# Altium PCB SBH.PcbDoc
Units mil, origin at the board's own origin, x right, y up, seen from the top; angles counter-clockwise.
Board outline 1968.5 x 1181.1 mil, 4 copper layers (Top Layer, Mid Layer 1, Mid Layer 2, Bottom Layer), stack 61.811 mil thick; 52 components, 69 nets, 223 pads, 52 vias.
Unrouted connection lines stored in the file: 30.
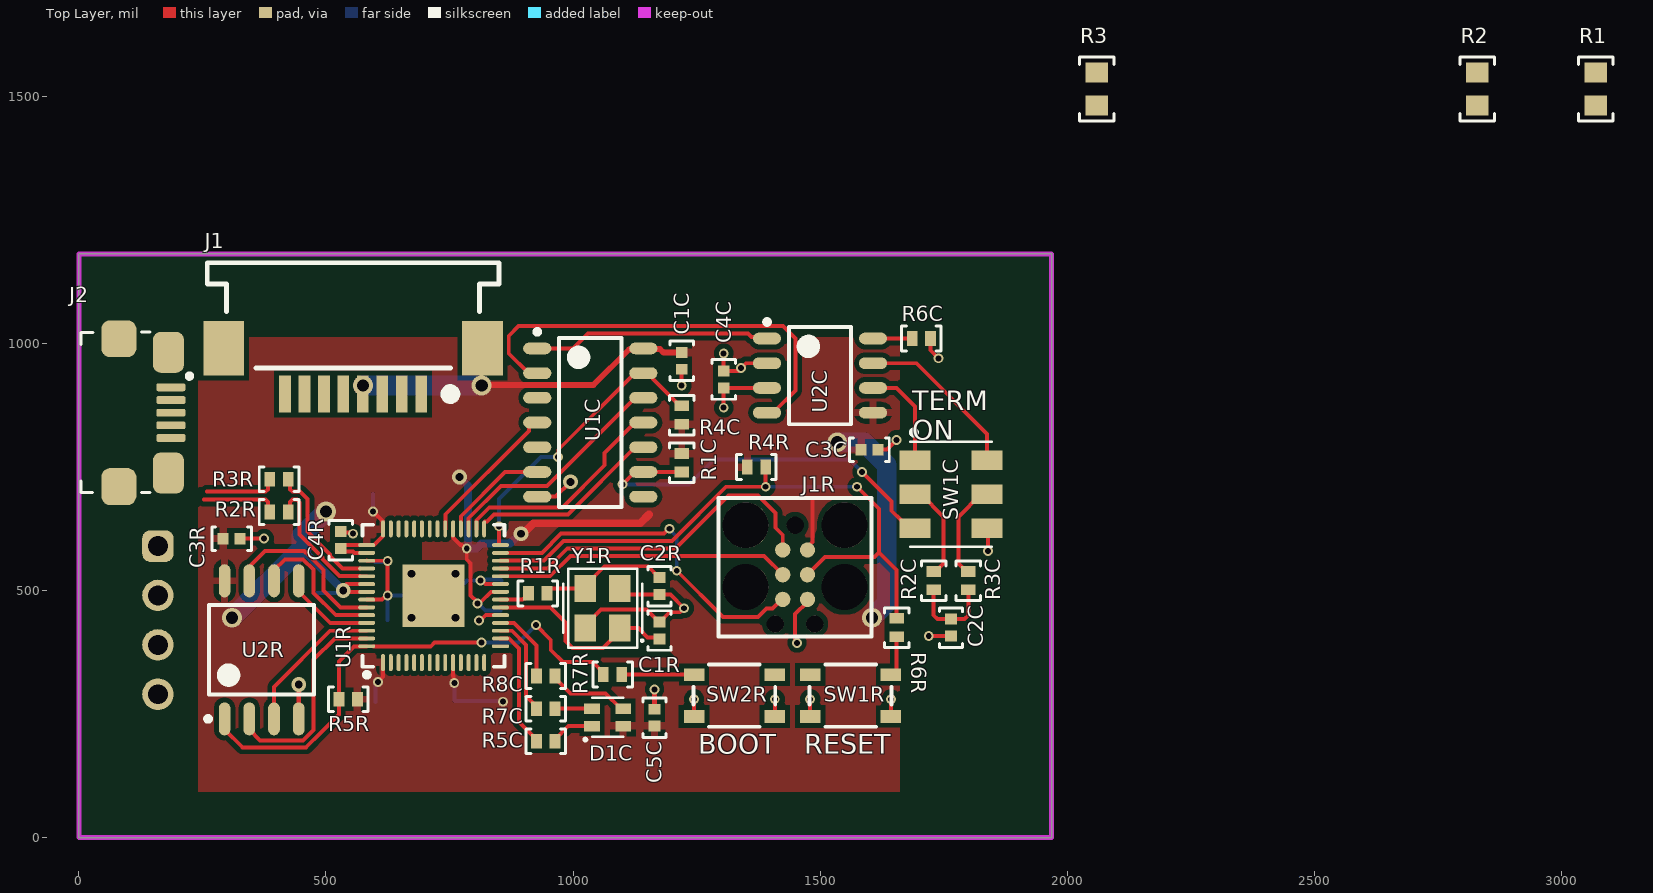
[diagram p0: Top Layer view]
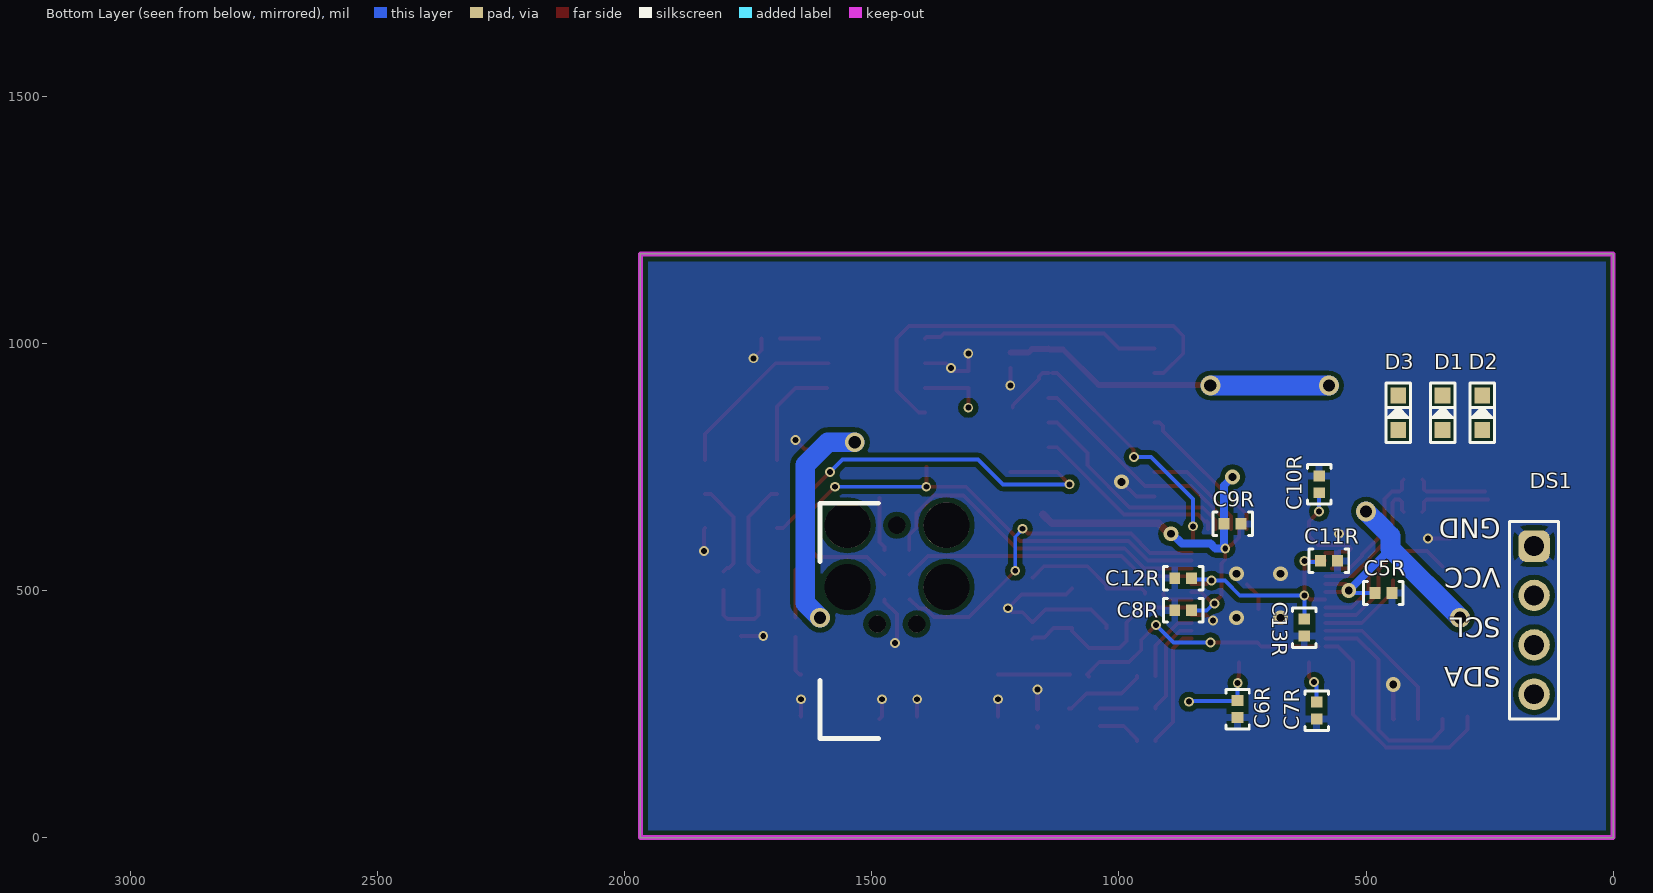
[diagram p1: Bottom Layer view, seen from below]
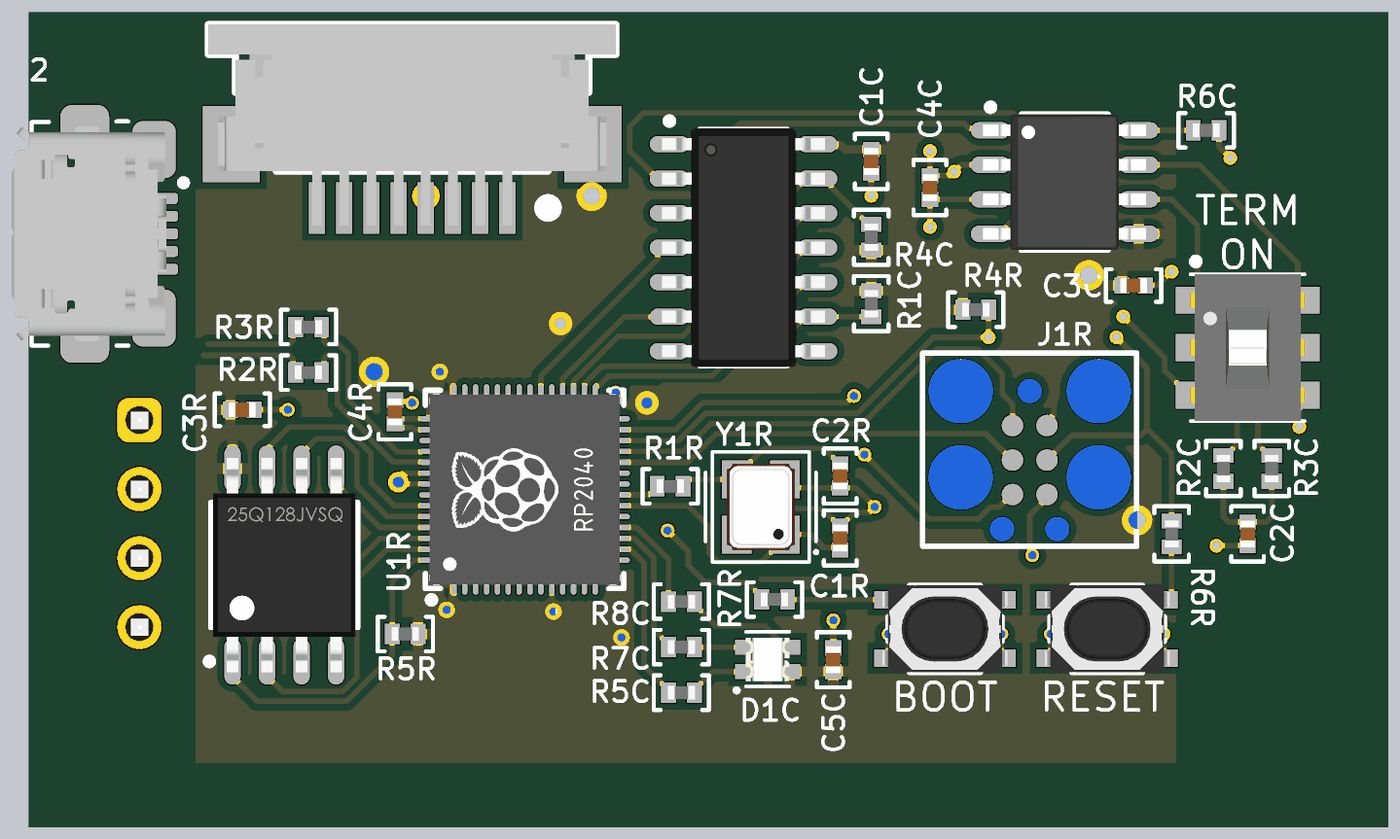
[diagram p2: 3D render of the assembled board from above, using the file's embedded part models]
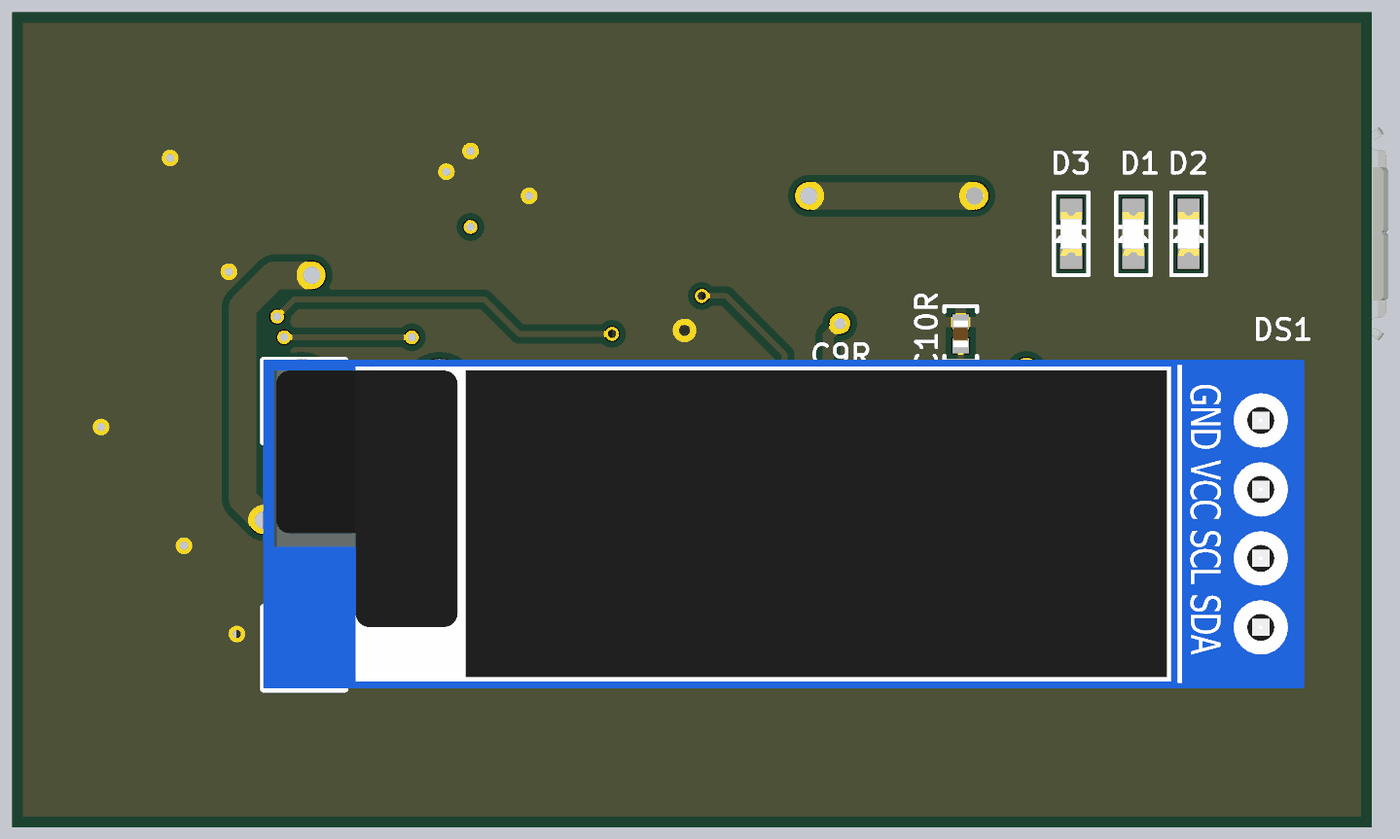
[diagram p3: 3D render of the assembled board from below, using the file's embedded part models]

## Layer stack, top to bottom
Top Solder: solder mask 0.5, Solder Resist, Dk 3.8
Top Layer: signal copper 1.378
Dielectric 1: prepreg 7.874, 7628, Dk 4.6
Mid Layer 1: signal copper 0.689
Core: core 41.9291, FR-4, Dk 4.5
Mid Layer 2: signal copper 0.689
Dielectric 2: prepreg 7.874, 7628, Dk 4.6
Bottom Layer: signal copper 1.378
Bottom Solder: solder mask 0.5, Solder Resist, Dk 3.8

## Board outline
0,0 1968.5,0 1968.5,1181.1 0,1181.1

## Design rules (kind name [scope] priority, off if disabled: settings)
Clearance [All] p1: gap=10 ignorepadtopadclearanceinfootprint=FALSE except(0: Arc-Hole Track-Hole SMDPad-Hole THPad-Hole Via-Hole Fill-Hole Poly-Hole Region-Hole Text-Hole; 6: Arc-Arc Arc-Track Arc-SMDPad Arc-Via Track-Track Track-SMDPad Track-Via SMDPad-SMDPad SMDPad-Via)
DiffPairsRouting [All] p1: maxlimit=10 minlimit=6 mostfreqgap=8 toplayer_minwidth=8 toplayer_maxwidth=15 toplayer_prefwidth=8 midlayer1_minwidth=8 midlayer1_maxwidth=15 midlayer1_prefwidth=8 midlayer2_minwidth=8 midlayer2_maxwidth=15 midlayer2_prefwidth=8 bottomlayer_minwidth=8 bottomlayer_maxwidth=15 bottomlayer_prefwidth=8 maxuncoupledlength=500
HoleSize [All] p1: absolutevalues=TRUE maxlimit=200 minlimit=12 maxpercent=80.000 minpercent=20.000
MinimumSolderMaskSliver [All] p1: minsoldermaskwidth=3
PlaneConnect [All] p1: pad.planeconnectstyle=Relief pad.reliefexpansion=20 pad.reliefentries=4 pad.reliefconductorwidth=10 pad.reliefairgap=10 via.planeconnectstyle=Direct via.reliefexpansion=20 via.reliefentries=4 via.reliefconductorwidth=10 via.reliefairgap=10
PolygonConnect [All] p1: thpad.connectstyle=Relief thpad.reliefconductorwidth=15 thpad.reliefentries=4 thpad.polygonreliefangle="45 Angle" thpad.airgapwidth=10 smdpad.connectstyle=Relief smdpad.reliefconductorwidth=15 smdpad.reliefentries=4 smdpad.polygonreliefangle="90 Angle" smdpad.airgapwidth=10 via.connectstyle=Direct via.reliefconductorwidth=10 via.reliefentries=4 via.polygonreliefangle="90 Angle" via.airgapwidth=10
RoomDefinition U_RP2040_with_CAN [InComponentClass('U_RP2040_with_CAN')] p1: confinementstyle=ConfineIn formatcopy=TRUE lockcomponents=FALSE outline -1000,-1000 1000,-1000 1000,0 -1000,0
RoomDefinition U_RP2040_C [InComponentClass('U_RP2040_C')] p2: confinementstyle=ConfineIn formatcopy=TRUE lockcomponents=FALSE outline -1000,-1000 1000,-1000 1000,0 -1000,0
RoomDefinition SBH_Microcontroller [InComponentClass('SBH_Microcontroller')] p3: confinementstyle=ConfineIn formatcopy=TRUE lockcomponents=FALSE outline 2015,55 2340,55 2340,745 2015,745
RoutingVias [All] p1: holewidth=28 width=50 viastyle="Through Hole" minholewidth=28 minwidth=50 maxholewidth=28 maxwidth=50
SilkToSilkClearance [All] p1: silktosilkclearance=3
SilkToSolderMaskClearance [IsPad] p1: minsilkscreentomaskgap=6 clearancetoexposedcopper=TRUE
SolderMaskExpansion [All] p1: expansion=2 istentingtop=FALSE
Width [All] p1: maxlimit=50 minlimit=6 preferedwidth=10
24 further rules are at their usual default settings.

## Classes and differential pairs
component class U_RP2040_C: C1R C2R C3R C4R C5R C6R C7R C8R C9R C10R C11R C12R C13R J1R R1R R2R R3R R4R R5R R6R R7R SW1R SW2R U1R U2R Y1R
component class U_RP2040_with_CAN: C1C C2C C3C C4C C5C D1C R1C R2C R3C R4C R5C R6C R7C R8C SW1C U1C U2C
component class SBH_Microcontroller: D1 D2 D3 DS1 J2 R1 R2 R3
differential pair class "USB 2.0": USB USB_RP2040
differential pair USB: +USB_P -USB_N
differential pair USB_RP2040: +USB_RP2040_P -USB_RP2040_N

## Components (designator, comment, footprint, x,y, rotation, side; value= is the part's Value field where it differs from the comment)
C1C "100nF Ceramic 25V" CAPACITOR_0402 1220,965 r270 top value=0.1uF
C1R "27pF Ceramic 50V" CAPACITOR_0402 1175,419.11 r90 top value=27pF
C2C "4700pF Ceramic 25V" CAPACITOR_0402 1765,425 r90 top value=4.7nF
C2R "27pF Ceramic 50V" CAPACITOR_0402 1175,509.11 r270 top value=27pF
C3C "100nF Ceramic 25V" CAPACITOR_0402 1600,785 r0 top value=0.1uF
C3R "100nF Ceramic 6.3V" CAPACITOR_0402 308.99,605 r0 top value=0.1uF
C4C "100nF Ceramic 25V" CAPACITOR_0402 1305,927.13 r90 top value=0.1uF
C4R "1uF Ceramic 16V" CAPACITOR_0402 530,601.98 r90 top value=1uF
C5C "1uF Ceramic 16V" CAPACITOR_0402 1165,242.7 r90 top value=1uF
C5R "100nF Ceramic 6.3V" CAPACITOR_0402 465,495 r180 bottom value=0.1uF
C6R "100nF Ceramic 6.3V" CAPACITOR_0402 760,260 r270 bottom value=0.1uF
C7R "100nF Ceramic 6.3V" CAPACITOR_0402 600,257.13 r270 bottom value=0.1uF
C8R "100nF Ceramic 6.3V" CAPACITOR_0402 870,460 r0 bottom value=0.1uF
C9R "100nF Ceramic 6.3V" CAPACITOR_0402 770,635 r180 bottom value=0.1uF
C10R "100nF Ceramic 6.3V" CAPACITOR_0402 595,715 r90 bottom value=0.1uF
C11R "1uF Ceramic 16V" CAPACITOR_0402 575,560 r180 bottom value=1uF
C12R "100nF Ceramic 6.3V" CAPACITOR_0402 870,525 r0 bottom value=0.1uF
C13R "100nF Ceramic 6.3V" CAPACITOR_0402 625,425 r270 bottom value=0.1uF
D1 "150060RS75000" LED_0603 345,860 r90 bottom
D1C "EAST1616RGBB4" LED_0606_4SMD 1070,243.29 r0 top
D2 "150060YS75000" LED_0603 265,860 r90 bottom
D3 "150060GS75000" LED_0603 435,860 r90 bottom
DS1 "DISP OLED 128x32" OLED_I2C_128x32 160,590 r0 bottom
J1 "FFC 1MM BOTTOM R/A" FFC_0522710869 555,935 r180 top
J1R "TagConnect SWD" TC2030-MCP 1449.5,632.13 r270 top
J2 "USB_MICRO R/A" CONN_MINIUSB 80.84,860 r270 top
R1 "62 Ohm 1% 1/4W" RESISTOR_0603 3070,1515 r90 top
R1C "10k Ohm 1% 1/16W" RESISTOR_0402 1220,758.7 r270 top
R1R "1k Ohm 1% 1/16W" RESISTOR_0402 928.7,494.11 r0 top
R2 "62 Ohm 1% 1/4W" RESISTOR_0603 2830,1515 r90 top
R2C "60.4 Ohm 1% 1/16W" RESISTOR_0402 1730,520 r270 top
R2R "27 Ohm 1% 1/16W" RESISTOR_0402 405,658.99 r0 top
R3 "4.7 Ohm 5% 1/8W" RESISTOR_0603 2060,1515 r90 top
R3C "60.4 Ohm 1% 1/16W" RESISTOR_0402 1800,520 r270 top
R3R "27 Ohm 1% 1/16W" RESISTOR_0402 405,725 r0 top
R4C "10k Ohm 1% 1/16W" RESISTOR_0402 1220,855 r90 top
R4R "10k Ohm 1% 1/16W" RESISTOR_0402 1371.3,750 r0 top
R5C "604 Ohm 1% 1/16W" RESISTOR_0402 945,195 r0 top
R5R "10k Ohm 1% 1/16W" RESISTOR_0402 545,280 r180 top
R6C "10k Ohm 1% 1/16W" RESISTOR_0402 1705,1010 r0 top
R6R "1k Ohm 1% 1/16W" RESISTOR_0402 1655,425 r90 top
R7C "200 Ohm 1% 1/16W" RESISTOR_0402 945,261.01 r0 top
R7R "1k Ohm 1% 1/16W" RESISTOR_0402 1080,330 r180 top
R8C "200 Ohm 1% 1/16W" RESISTOR_0402 945,327.02 r0 top
SW1C "Switch DPDT" CAS-220TA 1765,695 r270 top
SW1R "434123025826" SMD_434123025826 1561.69,287.32 r0 top
SW2R "434123025826" SMD_434123025826 1326.69,287.32 r0 top
U1C "MCP2517FD" SOIC-14 1035,840 r0 top
U1R "RP2040" "QFN-56 RP2040" 717.87,489.5 r90 top locked
U2C "CAN Transceiver" SOIC-8 1500,935 r0 top
U2R "W25Q128JVSIQ" "SOIC-8 W25QxJV" 369.86,380 r90 top
Y1R "CRYSTAL 12.0000MHZ 18PF SMD" "4-SMD, NO LEAD CRYSTAL 3.2x2.5mm" 1095,424.11 r90 top

## Footprints (in the part's own frame and the unit in brackets; to place one, negate y for a bottom-side part, rotate by r counter-clockwise, add the part's x,y. Pads: shape width x height; smd on the part's side, far side on the other; paste and mask are expansions set on the pad)
"4-SMD, NO LEAD CRYSTAL 3.2x2.5mm" [mm]
  rrect0% 1.4x1.1 smd: 1(0,0) 2(2.032,0) 3(2.032,1.778) 4(0,1.778)
  silkscreen extent -1.02,-1.2 3.05,2.92, body extent -0.58,-0.36 2.62,2.14, height 0.82
CAPACITOR_0402 [mm]
  rect 0.56x0.6 smd: 1(-0.435,0) 2(0.435,0)
  silkscreen extent -1.02,-0.6 1.02,0.6, body extent -0.5,-0.28 0.5,0.27, height 0.51
CAS-220TA [mm] "SWITCH SLIDE DPDT 100MA 6V"
  rrect0% 1x1.6 smd: 1(-1.75,-1.85) 2(0,-1.85) 3(1.75,-1.85) 4(-1.75,1.85) 5(0,1.85) 6(1.75,1.85)
  silkscreen extent -3.3,-2.1 2.7,2.1, body extent -2.7,-2.1 2.7,2.1, height 2.51
CONN_MINIUSB [mm] "USB2.0 Micro-B Receptacle SMD R/A"
  rrect50% 0.4x1.5 smd: 1(-1.3,2.675) 2(-0.65,2.675) 3(0,2.675) 4(0.65,2.675) 5(1.3,2.675)
  rrect50% 2.1x1.6 smd: 6(-3.1,2.55) 7(3.1,2.55)
  rrect50% 1.9x1.8 smd: 8(3.8,0) 9(-3.8,0)
  silkscreen extent -4.14,-1.96 4.11,3.75, body extent -3.96,-2.67 3.96,2.99, height 2.72
FFC_0522710869 [mm] "Molex FFC 8 Bottom 1.00MM R/A"
  rect 0.6x1.9 smd: 1(-3.5,0.95) 2(-2.5,0.95) 3(-1.5,0.95) 4(-0.5,0.95) 5(0.5,0.95) 6(1.5,0.95) 7(2.5,0.95) 8(3.5,0.95)
  rect 2.1x2.8 smd: MP1(-6.65,-1.4) MP2(6.65,-1.4)
  silkscreen extent -7.5,-5.8 7.5,1.2, body extent -7.5,-5.8 7.5,1.6, height 3.01
LED_0603 [mil] "LED 0603"
  rect 32x32 smd: 1(-35,0) 2(35,0)
  silkscreen extent -60,-25 60,25, body extent -31,-16 31,16, height 28
LED_0606_4SMD [mm]
  rrect0% 0.8x0.55 smd: 1(-0.8,-0.45) 2(-0.8,0.45) 3(0.8,0.45) 4(0.8,-0.45)
  silkscreen extent -1.22,-1.22 0.8,1.02, body extent -0.8,-0.8 0.8,0.8, height 0.35
OLED_I2C_128x32 [mm]
  rrect50% 1.62x1.62 hole 1.02: 1(0,0)
  round 1.62 hole 1.02: 2(0,2.54) 3(0,5.08) 4(0,7.62)
  silkscreen extent -1.25,-2.2 36.7,9.9, body extent -1.59,-2.23 36.71,9.87, height 5.12
"QFN-56 RP2040" [mm] "QFN, 56-Leads, Body 7.00x7.00mm, Pitch 0.40mm, Thermal Pad 3.10x3.10mm, IPC Medium Density"
  oval 0.875x0.2 smd: 1(-3.437,2.6) 2(-3.437,2.2) 3(-3.437,1.8) 4(-3.437,1.4) 5(-3.437,1) 6(-3.437,0.6) 7(-3.437,0.2) 8(-3.437,-0.2) 9(-3.437,-0.6) 10(-3.437,-1) 11(-3.437,-1.4) 12(-3.437,-1.8) 13(-3.437,-2.2) 14(-3.437,-2.6) 29(3.437,-2.6) 30(3.437,-2.2) 31(3.437,-1.8) 32(3.437,-1.4) 33(3.437,-1) 34(3.437,-0.6) 35(3.437,-0.2) 36(3.437,0.2) 37(3.437,0.6) 38(3.437,1) 39(3.437,1.4) 40(3.437,1.8) 41(3.437,2.2) 42(3.437,2.6)
  oval 0.2x0.875 smd: 15(-2.6,-3.437) 16(-2.2,-3.437) 17(-1.8,-3.437) 18(-1.4,-3.437) 19(-1,-3.437) 20(-0.6,-3.437) 21(-0.2,-3.437) 22(0.2,-3.437) 23(0.6,-3.437) 24(1,-3.437) 25(1.4,-3.437) 26(1.8,-3.437) 27(2.2,-3.437) 28(2.6,-3.437) 43(2.6,3.437) 44(2.2,3.437) 45(1.8,3.437) 46(1.4,3.437) 47(1,3.437) 48(0.6,3.437) 49(0.2,3.437) 50(-0.2,3.437) 51(-0.6,3.437) 52(-1,3.437) 53(-1.4,3.437) 54(-1.8,3.437) 55(-2.2,3.437) 56(-2.6,3.437)
  rect 3.2x3.2 smd: 57(0,0)
  silkscreen extent -4.19,-3.65 3.65,3.65, body extent -3.52,-3.52 3.52,3.52, height 0.85
RESISTOR_0402 [mm] "Resistor 0402"
  rect 0.55x0.75 smd: 1(-0.475,0) 2(0.475,0)
  silkscreen extent -1.02,-0.64 1.02,0.64, body extent -0.5,-0.25 0.5,0.25, height 0.25
RESISTOR_0603 [mil] "Resistor 0603"
  rect 40x45 smd: 1(-33.5,0) 2(33.5,0)
  silkscreen extent -65,-35 65,35, body extent -31,-16 32,16, height 16
SMD_434123025826 [mm]
  rect 1.05x0.65 smd: A1(-2.075,1.075) A2(2.075,1.075) B1(-2.075,-1.075) B2(2.075,-1.075)
  silkscreen extent -2.1,-1.6 2.1,1.6, body extent -2.3,-1.6 2.3,1.6, height 2.5
SOIC-8 [mm] "SOIC, 8-Leads, Body 4.90x3.90mm, Pitch 1.27mm, IPC Medium Density"
  oval 1.45x0.6 smd: 1(-2.725,1.905) 2(-2.725,0.635) 3(-2.725,-0.635) 4(-2.725,-1.905) 5(2.725,-1.905) 6(2.725,-0.635) 7(2.725,0.635) 8(2.725,1.905)
  silkscreen extent -2.85,-2.5 1.6,2.88, body extent -3,-2.5 3,2.5, height 1.75
"SOIC-8 W25QxJV" [mm] "SOIC, 8-Leads, Body 5.28x5.28mm, Pitch 1.27mm, IPC Medium Density"
  oval 1.7x0.6 smd: 1(-3.55,1.905) 2(-3.55,0.635) 3(-3.55,-0.635) 4(-3.55,-1.905) 5(3.55,-1.905) 6(3.55,-0.635) 7(3.55,0.635) 8(3.55,1.905)
  silkscreen extent -3.67,-2.7 2.3,2.88, body extent -3.95,-2.62 3.95,2.62, height 1.95
SOIC-14 [mm] "SOIC, 14-Leads, Body 8.65x3.90mm, Pitch 1.27mm, IPC Medium Density"
  oval 1.45x0.6 smd: 1(-2.725,3.81) 2(-2.725,2.54) 3(-2.725,1.27) 4(-2.725,0) 5(-2.725,-1.27) 6(-2.725,-2.54) 7(-2.725,-3.81) 8(2.725,-3.81) 9(2.725,-2.54) 10(2.725,-1.27) 11(2.725,0) 12(2.725,1.27) 13(2.725,2.54) 14(2.725,3.81)
  silkscreen extent -2.85,-4.35 1.6,4.78, body extent -3,-4.4 3,4.4, height 1.7
TC2030-MCP [mil]
  round 31 smd: 1(50,-25) 2(50,25) 3(100,-25) 4(100,25) 5(150,-25) 6(150,25)
  round 34 hole 35 unplated: A(0,0) B(200,40) C(200,-40)
  round 92 hole 93 unplated: D(0,-100) E(125,-100) F(0,100) G(125,100)
  silkscreen extent -55,-155 225,155

## Part data
C1C C3C C3R C4C C5R C6R C7R C8R C9R C10R C12R C13R: library part CAPACITOR_0.1uF_0402, "Cap 100nF 25V +/-10% / Ceramic 0402", Supplier Part Number 1=478-7868-1-ND, Tolerance="+/- 10%", Voltage=25V, Made By="Robert Pafford", Supplier 1=Digi-Key
C1R C2R: library part CAPACITOR_0.000027uF_0402, "Cap 27pF 50V +/-5% / Ceramic 0402", Supplier Part Number 1=445-5589-1-ND, Tolerance="+/- 5%", Voltage=50V, Made By="Robert Pafford", Supplier 1=Digi-Key
C2C: library part CAPACITOR_0.0047uF_0402, "4700 pF +/-10% 25V Ceramic Capacitor X7R 0402", Supplier Part Number 1=478-6195-1-ND, Tolerance="+/- 10%", Voltage=25V, Made By="Robert Pafford", Supplier 1=Digi-Key
C4R C5C C11R: library part CAPACITOR_1uF_0402, "Cap 1uF 16V +/-10% / Ceramic 0402", Supplier Part Number 1=478-0402YD105KAT4ADKR-ND, Tolerance="+/- 10%", Voltage=16V, Made By="Robert Pafford", Supplier 1=Digi-Key
D1: library part LED_Red_0603, "LED Red Vf= 2V If = 0.020A / IN-S63AT5G", Color=Red, Forward Current=20mA, Forward Voltage=2V, Package=0603, Supplier Part Number 1=732-4978-1-ND, ComponentLink1Description=Datasheet, ComponentLink1URL=https://www.we-online.de/katalog/datasheet/150060GS75000.pdf, Made By="Robert Pafford", Supplier 1=Digi-Key
D1C: library part LED_RGB_4SMD, "LED RGB CLEAR 4SMD", Blue Forward Current=5mA, Blue Forward Voltage=2.8V, Color=RGB, Package=4-SMD, Red Forward Voltage=1.8V, Supplier Part Number 1=1080-1552-1-ND, ComponentLink1Description=Datasheet, ComponentLink1URL=https://everlightamericas.com/index.php?controller=attachment&id_attachment=3220, Green Forward Current=5mA, Green Forward Voltage=2.8V, Made By="Robert Pafford", Red Forward Current=5mA, Supplier 1=Digi-Key
D2: library part LED_Yellow_0603, "LED Yellow Vf= 2V If = 0.020A / 150060YS75000", Color=Yellow, Forward Current=20mA, Forward Voltage=2V, Package=0603, Supplier Part Number 1=732-4981-1-ND, ComponentLink1Description=Datasheet, ComponentLink1URL=https://www.we-online.de/katalog/datasheet/150060GS75000.pdf, Made By="Robert Pafford", Supplier 1=Digi-Key
D3: library part LED_Green_0603_3.2V, "LED Green Vf= 3.2V If = 0.025A / 150060GS75000", Color=Green, Forward Current=25mA, Forward Voltage=3.2V, Package=0603, Supplier Part Number 1=732-4971-1-ND, ComponentLink1Description=Datasheet, ComponentLink1URL=https://www.we-online.de/katalog/datasheet/150060GS75000.pdf, Made By="Flip B", Supplier 1=Digi-Key
DS1: library part OLED_I2C_128x32, "0.91'' 128x32 I2C OLED LCD Display Module", Input Voltage="3.3V, 5V", Display Size=128x32, Made By="Robert Pafford", Protocol=I2C
J1: library part FFC_8POS_1MM_R/A_BOTTOM, "8 Position FPC Connector Contacts, Bottom 0.039\" (1.00mm) Surface Mount, Right Angle, Gold Contacts", Max Current=1A, Supplier Part Number 1=WM7939CT-ND, Contact Plating=Gold, FFC Type="ZIF Locking", Made By="Robert Pafford", Orientation="Bottom R/A", Pin Count=8, Supplier 1=Digi-Key
J1R: library part TC2030_SWD, "TagConnect TC2030 ARM SWD 6-pin"
J2: library part CONN_MICROUSB, "Amphenol Micro USB-B / USB2.0 5 Pin Right Angle SMD", Color=Silver, Current Per Pin=1.8A, Manufacturer=Amphenol, Supplier Part Number 1=609-4613-1-ND, ComponentLink1Description=Datasheet, ComponentLink1URL=https://cdn.amphenol-icc.com/media/wysiwyg/files/documentation/datasheet/inputoutput/io_usb_micro.pdf?__cf_chl_jschl_tk__=05693735e19256298f6ef6ca2bb2e65c376a4f56-1625503833-0-Abitsb0-ufjOXJYs_S3J3r2iTn-nObalbmXUksF1VvO_h_WEmRdMlUD1I8-hmWSEVWzY1pirKnrPZWfgY3851qyBZe5ZvnNQePLGIzUgdEIQBVUyW36RsbYpDLEWxJ4horD-5gChFgobLYqwmG5aHl0E8lIn_twwPPrOxilK2gP0q9t_CNOs_u5fMqXvXUrlsOv8tIE2NRlu6NVP8qtkL2GjhlkeTUbDMF8WvvpPDTFOgvZ4Y16Ej8F8AhWos88mo5B1HssXozw0XrkJQIqERITUu6rqloz9kf4ZzhBHtDAt-IkiAFY_Ds9SW8FYKKTtINJVpHZQ6Gyu1FFM4Dc9MO0maE8_mmNcwlxqyRoRk_MPWW8VyByXWM5RSp52jteRKw7FeI9WIYvCbPAOy0Eyib-aseIQsnGbglBcUY6_2xp8GYaJM38H3dNvBPsSOfJBPndKedwKHllxjkucXn6xsN0sDXkpGN-cu8_2bDTJ0g-uUucKSCooYX-ApSDNGpkA_p9zv1SOAD8c0zaZVmtiBsN75QpVz2rzq9_BFxOywPvR, Configuration="Right Angle", Created By="Flip B", Number of Positions=5, Pitch=0.65mm, Series=10118192, Supplier 1=Digi-Key
R1 R2: library part RESISTOR_62_0603, "RES SMD 62 OHM 1% 1/4W 0603", Digikey Part Numer=CR0603-JW-104ELFTR-ND, Supplier Part Number 1=541-RCS060362R0FKEACT-ND, Tolerance="+/- 1%", Value  (Ohms)=62, ComponentLink1Description=Datasheet, ComponentLink1URL=https://www.bourns.com/docs/product-datasheets/CRxxxxx.pdf, Made By="Robert Pafford", Supplier=Digikey, Supplier 1=Digi-Key, Wattage=1/4W
R1C R4C R4R R5R R6C: library part RESISTOR_10K_0402, "RES 10k OHM 1% 1/16W 0402", Digikey Part Numer=CR0603-JW-104ELFTR-ND, Supplier Part Number 1=YAG3436CT-ND, Tolerance="+/- 1%", Value  (Ohms)=10K, Made By="Robert Pafford", Supplier=Digikey, Supplier 1=Digi-Key, Wattage=1/16W
R1R R6R R7R: library part RESISTOR_1K_0402, "RES 1k OHM 1% 1/16W 0402", Digikey Part Numer=CR0603-JW-104ELFTR-ND, Supplier Part Number 1=13-AC0402FR-131KLCT-ND, Tolerance="+/- 1%", Value  (Ohms)=1K, Made By="Robert Pafford", Supplier=Digikey, Supplier 1=Digi-Key, Wattage=1/16W
R2C R3C: library part RESISTOR_60.4_0402, "RES 60.4 OHM 1% 1/16W 0402", Digikey Part Numer=CR0603-JW-104ELFTR-ND, Supplier Part Number 1=13-AC0402FR-0760R4LCT-ND, Tolerance="+/- 1%", Value  (Ohms)=60.4, Made By="Robert Pafford", Supplier=Digikey, Supplier 1=Digi-Key, Wattage=1/16W
R2R R3R: library part RESISTOR_27_0402, "RES 27 OHM 1% 1/16W 0402", Digikey Part Numer=CR0603-JW-104ELFTR-ND, Supplier Part Number 1=YAG5278DKR-ND, Tolerance="+/- 1%", Value  (Ohms)=27, Made By="Robert Pafford", Supplier=Digikey, Supplier 1=Digi-Key, Wattage=1/16W
R3: library part RESISTOR_4.7_0603, "RES 4.7 OHM 5% 1/8W 0603", Digikey Part Numer=CR0603-JW-104ELFTR-ND, Supplier Part Number 1=2019-RK73B1JTTD4R7JCT-ND, Tolerance="+/- 5%", Value  (Ohms)=4.7, Made By="Robert Pafford", Supplier=Digikey, Supplier 1=Digi-Key, Wattage=1/8W
R5C: library part RESISTOR_604_0402, "RES 604 OHM 1% 1/16W 0402", Digikey Part Numer=CR0603-JW-104ELFTR-ND, Supplier Part Number 1=13-AC0402FR-07604RLCT-ND, Tolerance="+/- 1%", Value  (Ohms)=604, Made By="Robert Pafford", Supplier=Digikey, Supplier 1=Digi-Key, Wattage=1/16W
R7C R8C: library part RESISTOR_200_0402, "RES 200 OHM 1% 1/16W 0402", Digikey Part Numer=CR0603-JW-104ELFTR-ND, Supplier Part Number 1=YAG3453CT-ND, Tolerance="+/- 1%", Value  (Ohms)=200, Made By="Robert Pafford", Supplier=Digikey, Supplier 1=Digi-Key, Wattage=1/16W
SW1C: library part CAS-220TA_CAN_TERM, "GOLD SWITCH FLUSH SLIDE DPDT 100MA 6V", Current Rating="100 mA", Supplier Part Number 1=CAS220JCT-ND, Voltage Rating=6VDC, Contact Finish=Gold, Made By="Robert Pafford", Supplier 1=Digi-Key, Switch Function=DPDT
SW1R SW2R: library part "Tactile Switch SMD", "WS-TASV J-Bend SMT Tact Switch, SPST-NO, 16VDC, 50mA, 260g", Manufacturer="Wurth Elektronik", Operating Temperature Max=85°C, Operating Temperature Min=-40°C, Rated Current=50mA, Rated Voltage=16VDC, Category="Tact Switches", Circuit=SPST-NO, ComponentLink1Description="Website Link", ComponentLink1URL=https://www.we-online.com/redexpert/article/434123025826?ad, ComponentLink2Description="Datasheet Link", ComponentLink2URL=https://www.we-online.com/redexpert/spec/434123025826?ad, Contact Material="Stainless Steel", Contact Plating=Silver, Height=2.5mm, Length=4.2mm, Manufacturer Part Number=434123025826, Match Code=WS-TASV, Mount="Surface Mount", Operation Force=260g, Packaging="Tape and Reel", Terminal Material="Copper Alloy", Terminal Plating=Silver, Washable=No, Width=3.2mm
U1C: "CANbus Controller CAN 2.0 SPI Interface 14-SOIC", Made By="Robert Pafford", Max FD Rate="8 Mbps"
U1R: "Raspberry Pi RP2040", Crystal Frequency="12 MHz", Input Voltage=3.3V, Available Busses="SPI, I2C, PWM, USB", ComponentLink1Description=DigiKey, ComponentLink2Description=Datasheet, ComponentLink2URL=https://datasheets.raspberrypi.org/rp2040/rp2040-datasheet.pdf, Made By="Robert Pafford", Number of GPIOs=29
U2C: library part TJA1442AT, "CAN Interface IC High-Speed CAN Transceiver with Standby Mode", Supplier Part Number 1=771-TJA1442AT/0Z, Made By="Robert Pafford", Max Data Rate=5Mbps, Supplier 1=Mouser
U2R: "IC FLASH 128MBIT SPI/QUAD 8SOIC", Supplier Part Number 1=W25Q128JVSIQ-ND, Made By="Robert Pafford", Size=128M, Supplier 1=Digi-Key
Y1R: library part CRYSTAL_12MHz_SMD_SMALL, "12 MHz ±20ppm Crystal 18pF 100 Ohms 4-SMD, No Lead (3.2x2.5mm)", Frequency="12 MHz", Load Capacitance=18pF, Supplier Part Number 1=2151-RH100-12.000-18-2030-EXT-TRCT-ND, ESR="100 Ohms", Made By="Robert Pafford", Supplier 1=Digi-Key

## Via types
v1: diameter 20, hole 12, Top Layer to Bottom Layer, 37 vias
v2: diameter 30, hole 16, Top Layer to Bottom Layer, 9 vias
v3: diameter 40, hole 25, Top Layer to Bottom Layer, 6 vias

## Nets (pads, with @x,y where several pads share a name; then routed paths per layer and width w, separated by ;. In a path a pad name is that pad's centre, name@x,y a point inside that pad or via, vN(x,y) a via of type N, cw(c..) or ccw(c..) an arc to the next point about the centre after c; other vN are vias at no path point)
1v1_RP2040: C11R.1 C12R.1 C13R.1 U1R.23 U1R.45 U1R.50 | length 533.4
  Top Layer w8: U1R.50 613.38,481.63 621.75,490 v1(625,490) v1(625,560) 624.7,560.3 582.6,560.3 U1R.45 ; v1(812.94,520) 816.19,520 823.07,513.12 U1R.23
  Bottom Layer w8: C11R.1 599.15,558.11 623.11,558.11 v1(625,560) ; C13R.1@625,440 C13R.1 v1(625,490) 625.5,489.5 754.69,489.5 785.19,520 v1(812.94,520) ; v1@810.2,520.2 812.3,522.3 853.45,522.3 C12R.1@855.55,520.2
3V3_RP2CAN: C1C.1 C3C.1 C3R.1 C4R.1 C5C.1 C5R.1 C6R.1 C7R.1 C8R.1 C9R.1 C10R.1 D1C.4 J1R.2 R1C.1 R4C.1 R4R.1 R5R.1 U1C.14 U1R.1 U1R.10 U1R.22 U1R.33 U1R.42 U1R.43 U1R.44 U1R.48 U1R.49 U2C.5 U2R.8 | length 3139.5
  Top Layer w8: v2@530.92,500.77 530.92,502.33 541.71,513.12 U1R.48 ; v2@531.28,497.44 U1R.49 U1R.49 ; U1R.44 557.99,576.11 555,579.11 535.75,579.11 C4R.1 536.94,591.8 582.48,591.8 U1R.43 596.86,591.86 615.51,610.51 U1R.42 615.51,639.49 v1(595,660) ; v1(605,315) 615.51,325.51 U1R.1 ; U1R.10 757.31,354.1 757.31,327.69 758.56,326.44 758.56,313.72 v1(759.75,312.52) ; U1R.33 757.31,624.77 757.31,607.52 772.53,592.3 774.46,592.3 781.75,585 v1(785,585) 785,562.5 792.94,554.56 792.94,490.3 806.55,476.69 v1(806.55,473.45) ; v1@813.95,477.3 833.97,497.31 853.15,497.31 U1R.22 ; J1R.2 1474.5,588.31 1484.5,598.31 1484.5,624.41 1484.5,687.13
  Top Layer w10: C5C.1@1165,222.87 C5C.1@1165,225
  Top Layer w12: v3(815,915) 816.19,916.19 1041.6,916.19 1113.19,987.78 1140.06,987.78 U1C.14 1143.44,988.84 1176.02,988.84 1182.74,982.13 C1C.1
  Top Layer w16: v2(895,615) 898.79,615 919.98,636.19 1136.19,636.19 1153.81,653.81
  Bottom Layer w8: C5R.1 524.05,495 529.05,500 v2(535,500) ; v1(595,660) C10R.1@595,695 ; C7R.1 600,306.75 605,311.75 v1(605,315) ; v1(759.75,312.52) 759.87,312.4 759.87,277.25 C6R.1 761.06,276.06 857.21,276.06 v1(858.27,275) ; v1(806.55,473.45) 808.99,473.45 822.44,460 C8R.1
  Bottom Layer w16: 450.42,584.58 v2@530,505 ; v2@766.21,730 v2(770,730) 787.13,712.87 C9R.1 787.13,588.21 785,586.08 v1(785,585) 805,585 815,595 872.57,595 892.57,615 v2(895,615)
  Bottom Layer w40: v3(310,445) 450.42,585.42 ; 450.42,584.58 450.42,610.42 469.27,629.27 v3(500,660) ; v3(575,915) v3(815,915) ; v3(1535,800) 1589.2,800 1635,754.2 1635,475 v3(1605,445)
5V: C4C.1 DS1.2 U2C.3 | length 127.7
  Top Layer w8: v1(1305,870) C4C.1 U2C.3
BMS_SCL: J1.7 U1R.9
BMS_SDA: J1.6 U1R.8
BMS_WAKE: J1.8 U1R.7
CANCLK_RP2CAN: U1C.6 U1R.32 | length 217.3
  Top Layer w8: U1R.32 773.06,624.9 773.06,650.34 862.72,740 U1C.6
CANH: J1.4 SW1C.4 U2C.7 | length 362.2
  Top Layer w8: U2C.7@1588.05,960 1695,960 1837.83,817.17 SW1C.4
CANL: J1.5 SW1C.1 U2C.6 | length 225.9
  Top Layer w8: U2C.6@1590.55,910 U2C.6 1655,910 1692.17,872.83 SW1C.1
CANRX_RP2CAN: U1C.2 U2C.4 | length 889
  Top Layer w8: U1C.2 910,940 870,980 870,1015 890,1035 1425,1035 1450,1010 1450,904.78 1405.22,860 U2C.4
CANTX_RP2CAN: U1C.1 U2C.1 | length 481.6
  Top Layer w8: U1C.1 1000,990 1030,1020 1354.17,1020 1361.24,1012.93 1389.79,1012.93 U2C.1
DBG_TX_RP2040: J1R.5 U1R.27 | length 721.1
  Top Layer w8: U1R.27 937.21,576.11 976.09,615 1184.31,615 1194.31,625 v1(1195,625) ; v1(1210,540) 1303.37,446.63 1374.56,446.63 1391.56,463.63 1404.11,463.63 1422.61,482.13 J1R.5
  Bottom Layer w8: v1(1195,625) 1195,623.89 1210,608.89 v1(1210,540)
DISP_SCL: DS1.3 U1R.3
DISP_SDA: DS1.4 U1R.2
GND_RP2CAN: C1C.2 C1R.2 C2C.1 C2R.2 C3C.2 C3R.2 C4C.2 C4R.2 C5C.2 C5R.2 C6R.2 C7R.2 C8R.2 C9R.2 C10R.2 C11R.2 C12R.2 C13R.2 DS1.1 J1.1 J1R.6 J2.5 J2.6 J2.7 J2.8 J2.9 R1.1 R2.1 R3.1 R6C.2 SW1C.6 SW1R.B1 SW1R.B2 SW2R.B1 SW2R.B2 U1C.7 U1R.19 U1R.57 U2C.2 U2R.4 Y1R.2 Y1R.4 | length 1356.4
  Top Layer w8: C3R.2@329.12,605 v1(375,605) ; C4R.2 532.05,617.05 552.95,617.05 v1(555,615) ; U1R.57@717.87,462.87 U1R.57 U1R.57@740.7,512.33 ; v1(809.76,439.62) 812.87,439.62 823.38,450.13 U1R.19 ; U1C.7 965,690 v2(995,720) ; Y1R.4 1025,430.01 1056.65,461.67 1148.78,461.67 1174.21,436.23 C1R.2 1175.79,436.23 1195.63,456.07 1216.96,456.07 v1(1225,464.11) 1197.13,491.98 C2R.2 1107.13,491.98 Y1R.2 ; v1(1220,915) C1C.2 C1C.2@1220,950 ; SW2R.B1 v1@1245,285 ; C4C.2 1334.25,944.25 1350,960 U2C.2 ; C4C.2@1305,945 v1(1305,980) ; SW2R.B2 v1(1408.39,280) ; v1(1453.27,394.13) 1449.5,397.9 1449.5,452.16 1474.5,477.16 J1R.6 ; SW1R.B1 v1(1480,280) ; SW1R.B1@1481.61,242.68 SW1R.B1@1484.29,240 ; C3C.2 1617.59,785.46 1635.46,785.46 v1(1655,805) ; SW1R.B2 SW1R.B2@1645,246.61 ; SW1R.B2@1643.39,246.61 v1(1643.39,280) ; v1@1720,405 v1@1721.44,406.44 ; v1@1721.44,407.87 C2C.1@1763.56,407.87 ; R6C.2 1723.7,986.3 v1(1740,970) ; C2C.1@1763.56,406.44 C2C.1 ; SW1C.6 1840,623.94 v1(1840,580)
  Top Layer w10: U2R.4 444.93,240.3 444.93,309.93 v2(445,310) ; C5C.2 v1(1165,300)
  other v1: 1245,280 1720,407.87 1340,950
  other v2: 673.37,445 762.37,445 673.37,534 762.37,534
INT_RP2CAN: U1C.4 U1R.34 | length 298.2
  Top Layer w8: U1R.34 741.5,653.78 910.51,822.8 910.51,832.78 917.73,840 U1C.4
LED_G: D3.1 U1R.6
LED_R: D1.1 U1R.4
LED_Y: D2.1 U1R.5
LEDB_RP2CAN: R8C.1 U1R.18 | length 153.7
  Top Layer w8: U1R.18 880.62,434.38 926.3,388.7 R8C.1
LEDG_RP2CAN: R7C.1 U1R.17 | length 201.5
  Top Layer w8: U1R.17 876.37,418.63 905,390 905,286.25 926.3,264.95 R7C.1
LEDR_RP2CAN: R5C.1 U1R.16 | length 248.3
  Top Layer w8: U1R.16 870.43,402.89 872.24,401.07 891,382.34 891,234.24 926.3,198.94 R5C.1
MISO_RP2CAN: U1C.12 U1R.31 | length 475.9
  Top Layer w8: U1R.31 788.8,624.9 788.8,646.29 854.33,711.81 947.36,711.81 1125.55,890 U1C.12
MOSI_RP2CAN: U1C.11 U1R.30 | length 451.6
  Top Layer w8: U1R.30 804.55,624.9 804.55,642.24 830.5,668.19 978.54,668.19 1063.96,753.6 1063.96,778.41 1125.55,840 U1C.11
nCS_RP2CAN: R4C.2 U1C.13 U1R.28 | length 603
  Top Layer w8: v1(850,630) 850,591.93 850.06,591.86 U1R.28 ; v1(970,770) 970.19,770.19 970.19,784.92 1125.28,940 U1C.13@1135,940 ; U1C.13 1154.79,940 1162,932.78 1162,927.76 1209.24,880.53 1215,874.76 R4C.2@1215,870
  Bottom Layer w8: v1(850,630) 850,685 935,770 v1(970,770)
NetC2C_2: C2C.2 R2C.2 R3C.2 | length 179.1
  Top Layer w8: R2C.2 1730,450 1737.87,442.13 C2C.2 1792.13,442.13 1800,450 R3C.2
NetC2R_1: C2R.1 R1R.2 Y1R.3 | length 265.2
  Top Layer w8: R1R.2 947.4,497.28 954.23,504.11 Y1R.3 1025,510.01 1064.09,549.11 1151.34,549.11 1174.21,526.23 C2R.1
NetD1_2: D1.2 R1.2
NetD1C_1: D1C.1 R5C.2 | length 89.8
  Top Layer w8: R5C.2 963.7,198.94 990.34,225.58 D1C.1
NetD1C_2: D1C.2 R7C.2 | length 75.3
  Top Layer w8: R7C.2 D1C.2@1038.99,261.01
NetD1C_3: D1C.3 R8C.2 | length 167.4
  Top Layer w8: R8C.2 963.7,323.08 994.74,292.05 1065.54,292.05 1096.57,261.01 D1C.3
NetD2_2: D2.2 R2.2
NetD3_2: D3.2 R3.2
NetR2C_1: R2C.1 SW1C.2 | length 197.8
  Top Layer w8: SW1C.2 1703.98,695 1750,648.98 1750,554.76 1733.94,538.7 R2C.1
NetR3C_1: R3C.1 SW1C.5 | length 197.8
  Top Layer w8: R3C.1 1793.17,545.53 1789.24,545.53 1780,554.76 1780,648.98 1826.02,695 SW1C.5
NetR6C_1: R6C.1 U2C.8 | length 79
  Top Layer w8: U2C.8 R6C.1
NetR6R_1: R6R.1 SW1R.A2 | length 85.9
  Top Layer w8: R6R.1 1655,338.44 SW1R.A2@1646.2,329.65 ; SW1R.A2@1646.2,329.65 SW1R.A2 SW1R.A2@1646.2,329.65
NetR7R_1: R7R.1 SW2R.A1 | length 146.3
  Top Layer w8: R7R.1 SW2R.A1@1245,330
NetU1R_11: U1R.11
NetU1R_12: U1R.12
NetU1R_13: U1R.13
NetU1R_14: U1R.14
NetU1R_15: U1R.15
NetU1R_35: U1R.35
NetU1R_36: U1R.36
NetU1R_37: U1R.37
NetU1R_38: U1R.38
NetU1R_39: U1R.39
NetU1R_40: U1R.40
NetU1R_41: U1R.41
QSPI_SCLK_RP2040: U1R.52 U2R.6 | length 271
  Top Layer w8: U2R.6@395,541.42 416.81,563.23 453.9,563.23 475,542.13 475,495 519.87,450.13 U1R.52
QSPI_SD0_RP2040: U1R.53 U2R.5 | length 185.8
  Top Layer w8: U2R.5@445,520 445,519.76 445,498.11 508.73,434.38 U1R.53
QSPI_SD1_RP2040: U1R.55 U2R.2 | length 436.6
  Top Layer w8: U2R.2@345,240 345,218.58 366.81,196.77 453.9,196.77 475,217.87 475,360 517.89,402.89 U1R.55
QSPI_SD2_RP2040: U1R.54 U2R.3 | length 299.4
  Top Layer w8: U2R.3@395,240.24 395,305 508.57,418.57 U1R.54 U1R.54
QSPI_SD3_RP2040: U1R.51 U2R.7 | length 322.4
  Top Layer w8: U2R.7@345,548.49 376.51,580 456.26,580 459.03,577.23 459.7,577.23 495.36,541.56 495.36,499.64 529.12,465.88 U1R.51
QSPI_SS_RP2040: R5R.2 R7R.2 U1R.56 U2R.1 | length 1017.3
  Top Layer w8: U2R.1@294.93,245.07 295,245 295,218.45 330.68,182.77 459.7,182.77 489.58,212.66 526.3,249.37 R5R.2 526.3,356.3 557.14,387.14 U1R.56 ; U1R.56@595.76,387.14 712.14,387.14 720,395 v1(815,395) ; v1(925,430) 955,400 955,380 980,355 1040,355 R7R.2@1065,330 ; R7R.2@1060.65,325.61 R7R.2@1061.3,326.26
  Bottom Layer w8: v1(815,395) 890,395 v1(925,430)
RUN_RP2040: J1R.4 R4R.2 R6R.2 U1R.26 | length 1285.5
  Top Layer w8: U1R.26 853.27,560.43 941.32,560.43 980.89,600 1200,600 1310,710 v1(1390,710) R4R.2 ; J1R.4 1510,567.63 1610,567.63 1619.5,577.13 ; v1(1575,710) 1619.5,665.5 1619.5,577.13 ; R6R.2@1655,445 1655,541.63 1619.5,577.13
  Bottom Layer w8: v1(1390,710) v1(1575,710)
SCK_RP2CAN: U1C.10 U1R.29 | length 398.2
  Top Layer w8: U1R.29 820.24,638 822.24,640 825.51,640 839.7,654.19 989.74,654.19 1125.55,790 U1C.10
SWCLK_RP2040: J1R.3 U1R.24 | length 602.9
  Top Layer w8: U1R.24 953.87,528.87 995,570 1325,570 ; 1326.07,570 1386.63,570 J1R.3
SWDIO_RP2040: J1R.1 U1R.25 | length 713.8
  Top Layer w8: U1R.25 947.99,544.62 988.37,585 1207.17,585 1314.8,692.63 1374.56,692.63 1410,657.19 1410,627.08 1424.5,612.58 J1R.1
TERM_DET_RP2CAN: R1C.2 SW1C.3 U1C.9 | length 811.6
  Top Layer w8: v1(1100,715) 1125,740 U1C.9 R1C.2 ; v1(1585,740) 1645,680 1645,661.52 1664.67,641.85 1664.67,641.79 1680.35,626.1 SW1C.3
  Bottom Layer w8: v1(1100,715) 1235,715 1285,765 1560,765 v1(1585,740)
USB_N: J2.2 R3R.1 | length 147
  Top Layer w8: 259.3,699.99 377.71,699.99 382.4,704.68 382.4,721.1 R3R.1
USB_P: J2.3 R2R.1 | length 153.6
  Top Layer w8: 252.68,683.99 377.71,683.99 382.4,679.31 382.4,662.89 R2R.1
USB_RP2040_N: R3R.2 U1R.46 | length 271.3
  Top Layer w8: R3R.2 427.6,721.1 427.6,704.68 432.29,699.99 447.88,699.99 462.91,684.97 462.91,619.71 474.86,607.77 474.86,606.16 508.19,572.83 508.19,569.69 533.7,544.18 568.94,544.18 U1R.46@569.32,544.56
USB_RP2040_P: R2R.2 U1R.47 | length 283.1
  Top Layer w8: R2R.2 427.6,662.89 427.6,679.31 432.29,683.99 441.26,683.99 446.91,678.34 446.91,613.09 493.33,566.67 493.33,563.53 527.55,529.31 568.94,529.31 569.38,528.87 U1R.47
VBAT: J1.2
VPACK: J1.3
XIN_RP2040: C1R.1 U1R.20 Y1R.1 | length 406.7
  Top Layer w8: U1R.20 954.12,465.88 985,435 985,397.65 998.54,384.11 1060.91,384.11 1095,418.2 Y1R.1 1132.37,424.11 1151.19,405.29 1171.69,405.29 C1R.1
XOUT_RP2040: R1R.1 U1R.21 | length 64.3
  Top Layer w8: U1R.21 897.52,481.63 899.24,483.34 903.17,483.34 910,490.17 R1R.1
pads on no net: J1.MP1 J1.MP2 J1R.A J1R.B J1R.C J1R.D J1R.E J1R.F J1R.G J2.1 J2.4 SW1R.A1 SW2R.A2 U1C.3 U1C.5 U1C.8

## Polygon pours and split planes (outlines as drawn)
3V3_RP2CAN on Top Layer "3V3_RP2040" (solid, pour order 0): 241.46,1012.79 1661.46,1012.79 1661.46,92.79 241.46,92.79
GND_RP2CAN on Bottom Layer "GND_L04_P001" (solid, pour order 1): 0,0 1968.5,0 1968.5,1181.1 0,1181.1

## Keep-outs
Keep-Out Layer:
  the board outline again, w10

## Other copper
Top Layer:
  pour cut-out: 785,494.23 835,444.23 835,399.23 745,399.23 745,434.23
  pour cut-out: 694.78,387.14 695,387.36 695,604.11 642.39,604.11 615.07,576.79 615.07,504.17 600,489.11 600,389.11
  pour cut-out: 1125,1010 915,1010 910,1005 910,755 1050,755 1140,815
  pour cut-out: 984.69,384.11 984.72,384.07 984.72,363.67 1209.45,363.67 1196.81,376.31 1196.81,380.96 1161.25,380.96 1137.19,405.02 1115.02,405.02 1100,390 1090,390
  pour cut-out: 1493,624.69 1488.94,613.94 1488.94,581.06 1495,575 1525,575 1525,600 1515,610

## Silkscreen, mask and mechanical layers (free items; w line width, h text height)
Top Overlay:
  text "TERM / ON" at 1686.69,805 h40
  text "BOOT" at 1253.38,170.01 h40
  text "RESET" at 1468.39,170.01 h40

## Text inside footprints (layer, text, board x,y; h text height)
DS1: Bottom Overlay "SDA" at 226.93,344.99 h40 r180; Bottom Overlay "SCL" at 226.93,444.99 h40 r180; Bottom Overlay "VCC" at 226.93,544.99 h40 r180; Bottom Overlay "GND" at 226.93,644.99 h40 r180